# Altium PCB CH32L103C8T6-R0-1v2.PcbDoc
Units mil, origin at the board's own origin, x right, y up, seen from the top; angles counter-clockwise.
Board outline 1811.04 x 2204.72 mil, 2 copper layers (Top Layer, Bottom Layer); 43 components, 60 nets, 212 pads, 186 vias.
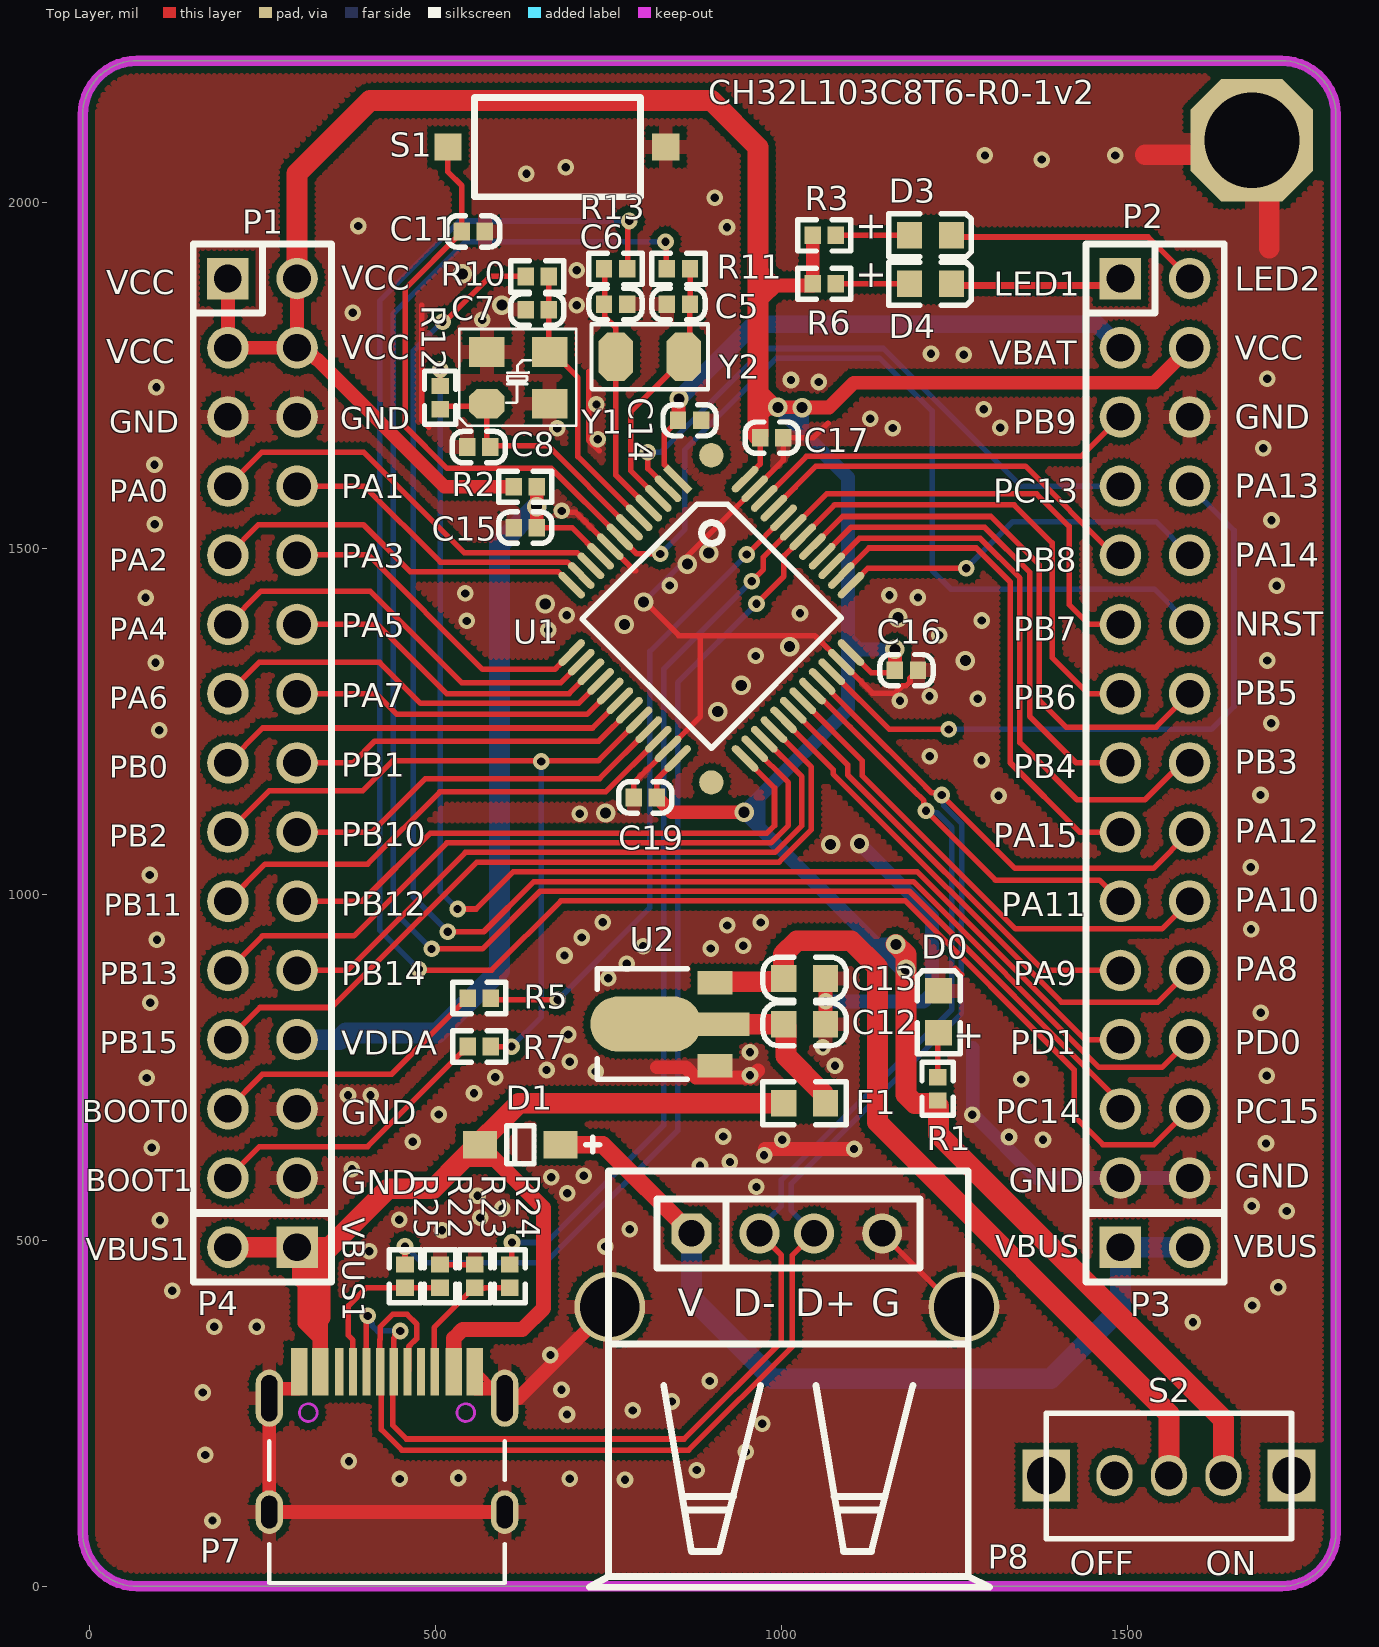
[diagram p0: Top Layer view]
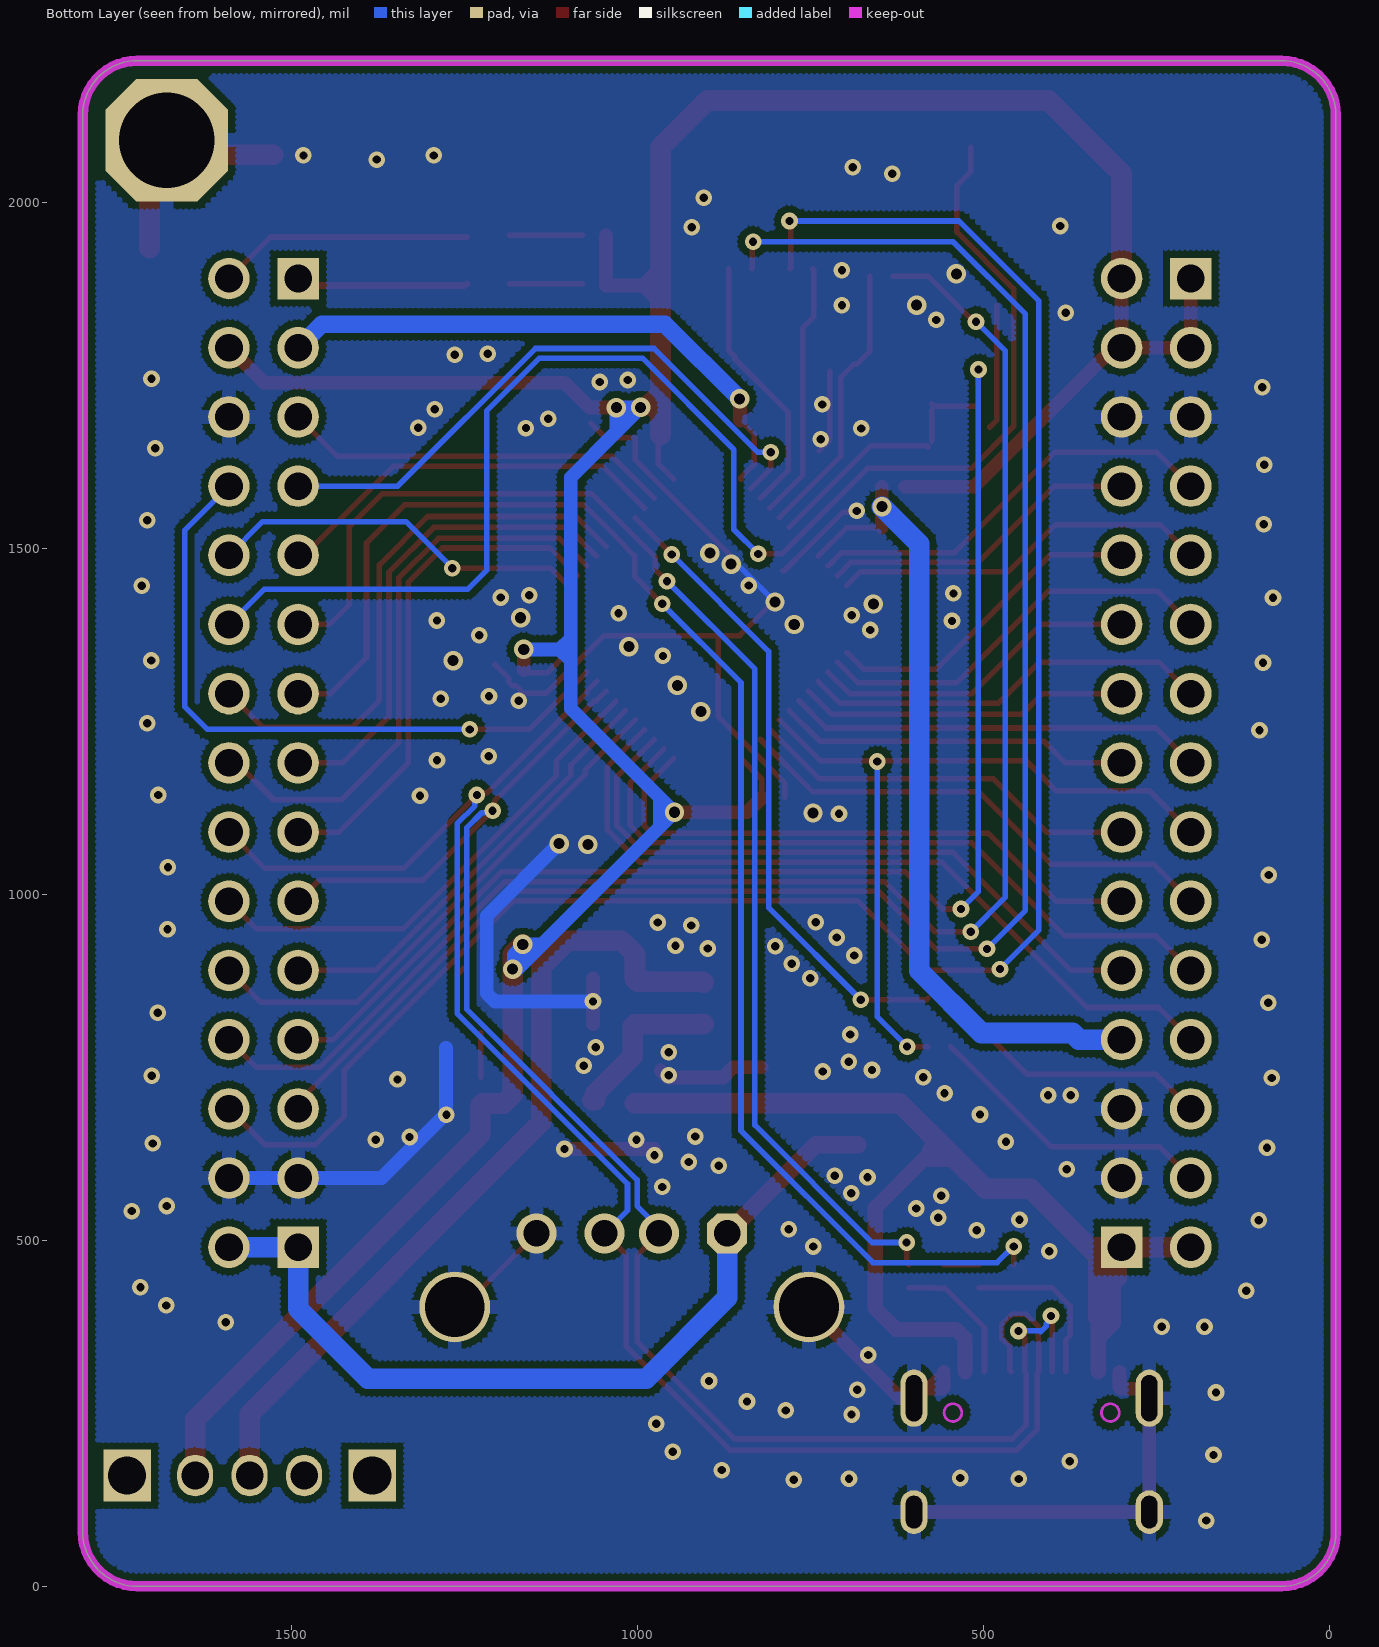
[diagram p1: Bottom Layer view, seen from below]

## Layer stack, top to bottom
Top Solder: solder mask 0.4, Solder Resist, Dk 3.5
Top Layer: signal copper 1.4
Dielectric1: dielectric 12.6, FR-4, Dk 4.8
Bottom Layer: signal copper 1.4
Bottom Solder: solder mask 0.4, Solder Resist, Dk 3.5

## Board outline
69.02,0 cw(c69.02,78.74) -9.72,78.74 -9.72,2125.98 cw(c69.02,2125.98) 69.02,2204.72 1722.6,2204.72 cw(c1722.6,2126.01) 1801.31,2126.01 1801.31,2126.13 1801.31,78.74 cw(c1722.57,78.74) 1722.57,0

## Design rules (kind name [scope] priority, off if disabled: settings)
Clearance Clearance_1 [InPolygon] p1: gap=10 ignorepadtopadclearanceinfootprint=FALSE
Clearance [All] p2: gap=6 ignorepadtopadclearanceinfootprint=FALSE except(8: Arc-Via Track-Via SMDPad-Via THPad-Via Via-Via Via-Fill Via-Poly Via-Region Via-Hole)
ComponentClearance [All] p1 off: gap=10 collisioncheckmode=3 verticalgap=10 showdistances=FALSE
DiffPairsRouting [All] p1: maxlimit=10 minlimit=6 mostfreqgap=8 toplayer_minwidth=6 toplayer_maxwidth=15 toplayer_prefwidth=8 bottomlayer_minwidth=6 bottomlayer_maxwidth=15 bottomlayer_prefwidth=8 maxuncoupledlength=500
MinimumSolderMaskSliver [All] p1 off: minsoldermaskwidth=10
PolygonConnect PolygonConnect_1 [IsVia] p1: connectstyle=Direct reliefconductorwidth=10 reliefentries=4 polygonreliefangle="90 Angle" airgapwidth=10
PolygonConnect [All] p2: connectstyle=Relief reliefconductorwidth=20 reliefentries=4 polygonreliefangle="90 Angle" airgapwidth=10
RoutingVias [All] p1: holewidth=16 width=28 viastyle="Through Hole" minholewidth=12 minwidth=24 maxholewidth=28 maxwidth=50
SilkToSilkClearance [All] p1 off: silktosilkclearance=10
SilkToSolderMaskClearance [IsPad] p1 off: minsilkscreentomaskgap=10 clearancetoexposedcopper=TRUE
SolderMaskExpansion [All] p1: expansion=2 istentingtop=FALSE
Width [All] p1: maxlimit=100 minlimit=6 preferedwidth=10
25 further rules are at their usual default settings.

## Classes and differential pairs
differential pair NewDifferentialPair1: +PA12 -PA11

## Components (designator, comment, footprint, x,y, rotation, side; value= is the part's Value field where it differs from the comment)
C5 "12pF" 0402_C 868,1853 r270 top
C6 "12pF" 0402_C 743.54,1853 r90 top
C7 "22pF" 0402_C 630.54,1845 r90 top
C8 "22pF" 0402_C 545.82,1646.4 r90 top
C11 "0.1uF" 0402_C 571.46,1958 r270 top
C12 "10uF" 0603_C 1003.19,812.25 r0 top
C13 "10uF" 0603_C 1003.19,878.25 r0 top
C14 "0.1uF" 0402_C 850.54,1685 r90 top value=15pF
C15 "0.1uF" 0402_C 646.46,1530 r270 top value=15pF
C16 "0.1uF" 0402_C 1164.01,1324.01 r90 top value=15pF
C17 "0.1uF" 0402_C 1002.83,1660 r270 top value=15pF
C19 "0.1uF" 0402_C 786.54,1140 r90 top value=15pF
D0 "POWER  red" 0603+ 1227.1,799.91 r90 top
D1 "Diode" SOD-123 680.81,638.25 r180 top
D3 "LED2" 0603+ 1185.18,1952.38 r0 top
D4 "LED1" 0603+ 1185.18,1882.38 r0 top
F1 "500mA" 0603 1003.19,698.2 r0 top
P1 "HEADER 14x2" IDC28-2.54MM 200,1890 r0 top
P2 "HEADER 14x2" IDC28-2.54MM 1490,1890 r0 top
P3 "HEADER 2" SIP2-2.54mm 1490,490 r270 top
P4 "HEADER 2" SIP2-2.54mm 300,490 r90 top
P7 "TYPE-C" TYPE-C-Receptacle-2.0 430,310 r0 top
P8 "USB_A" USBAF 870,510 r0 top
R1 "1K" 0402 1225.82,735.63 r270 top
R2 "0Ω" 0402 613,1589 r0 top
R3 "1K" 0402 1045.18,1952.38 r0 top
R5 "10K" 0402 580,850 r180 top
R6 "1K" 0402 1045.18,1882.38 r0 top
R7 "10K" 0402 580,780 r180 top
R10 "NC(0Ω)" 0402 630.54,1893 r0 top
R11 "NC(0Ω)" 0402 834.54,1904 r0 top
R12 "NC(0Ω)" 0402 506.79,1734.7 r270 top
R13 "NC(0Ω)" 0402 777,1904 r180 top
R22 "5.1K" 0402 506.45,431.54 r90 top
R23 "5.1K" 0402 556.91,431.54 r90 top
R24 "0Ω" 0402 607.36,465 r270 top
R25 "0Ω" 0402 456,431.54 r90 top
S1 "KEY" SMD_6.1x3.65x2.5mm-KEY 518,2080 r0 top
S2 "SW" SW1 1560,160 r0 top
U1 "CH32L103C8T" LQFP48 850,1600 r225 top
U2 "HT7533" SOT-89 904.04,752.55 r90 top
Y1 "8M" XT3225 574.45,1709 r0 top
Y2 "32.768k" FC-135 859,1777 r180 top

## Footprints (in the part's own frame and the unit in brackets; to place one, negate y for a bottom-side part, rotate by r counter-clockwise, add the part's x,y. Pads: shape width x height; smd on the part's side, far side on the other; paste and mask are expansions set on the pad)
0402 [mm]
  rect 0.6x0.65 smd mask+0.051: 1(0,0) 2(0.85,0)
  silkscreen extent -0.55,-0.58 1.4,0.57
0402_C [mm]
  rect 0.65x0.6 smd mask+0.051: 1(0,0) 2(0,-0.85)
  silkscreen extent -0.58,-1.4 0.57,0.55
0603 [mm]
  rect 0.93x0.98 smd: 1(0,0) 2(1.54,0)
  silkscreen extent -0.76,-0.79 2.3,0.79
0603+ [mm]
  rect 0.93x0.98 smd: 1(0,0) 2(1.54,0)
  silkscreen extent -0.76,-0.79 2.27,0.79
0603_C [mm]
  rect 0.93x0.98 smd mask+0.051: 1(0,0) 2(1.54,0)
  silkscreen extent -0.76,-0.79 2.31,0.79
FC-135 [mil]
  oct 50x70 smd: 1(0,0) 2(98.43,0)
  silkscreen extent -35,-47 133,47
IDC28-2.54MM [mil]
  rect 60x60 hole 40: 1(0,0)
  round 60 hole 40: 2(100,0) 3(0,-100) 4(100,-100) 5(0,-200) 6(100,-200) 7(0,-300) 8(100,-300) 9(0,-400) 10(100,-400) 11(0,-500) 12(100,-500) 13(0,-600) 14(100,-600) 15(0,-700) 16(100,-700) 17(0,-800) 18(100,-800) 19(0,-900) 20(100,-900) 21(0,-1000) 22(100,-1000) 23(0,-1100) 24(100,-1100) 25(0,-1200) 26(100,-1200) 27(0,-1300) 28(100,-1300)
  silkscreen extent -50,-1351 150,50
LQFP48 [mm]
  round 0.889 smd: 0(-1.496,0.254) 0(6.996,8.746)
  rect 0.28x1.27 smd mask+0.051: 1(0,0)
  oval 0.28x1.27 smd mask+0.051: 2(0.5,0) 3(1,0) 4(1.5,0) 5(2,0) 6(2.5,0) 7(3,0) 8(3.5,0) 9(4,0) 10(4.5,0) 11(5,0) 12(5.5,0) 25(5.5,9) 26(5,9) 27(4.5,9) 28(4,9) 29(3.5,9) 30(3,9) 31(2.5,9) 32(2,9) 33(1.5,9) 34(1,9) 35(0.5,9) 36(0,9)
  oval 1.27x0.28 smd mask+0.051: 13(7.25,1.75) 14(7.25,2.25) 15(7.25,2.75) 16(7.25,3.25) 17(7.25,3.75) 18(7.25,4.25) 19(7.25,4.75) 20(7.25,5.25) 21(7.25,5.75) 22(7.25,6.25) 23(7.25,6.75) 24(7.25,7.25) 37(-1.75,7.25) 38(-1.75,6.75) 39(-1.75,6.25) 40(-1.75,5.75) 41(-1.75,5.25) 42(-1.75,4.75) 43(-1.75,4.25) 44(-1.75,3.75) 45(-1.75,3.25) 46(-1.75,2.75) 47(-1.75,2.25) 48(-1.75,1.75)
  silkscreen extent -0.65,1.15 6.11,7.86
SIP2-2.54mm [mil]
  rect 60x60 hole 40: 1(0,0)
  round 60 hole 40: 2(0,100)
  silkscreen extent -50,-50 50,150
SMD_6.1x3.65x2.5mm-KEY [mm]
  rect 1x1 smd: 1(0,0) 2(8,0)
  silkscreen extent 0.98,-1.83 7.08,1.83
SOD-123 [mm]
  rect 1.25x1 smd: 1(0,0) 2(2.95,0)
  silkscreen extent -1.43,-0.7 1.97,0.7
SOT-89 [mil]
  rect 34x50 smd: 1(0,0) 3(120,0)
  rect 34x100 smd: 2(60,0)
  oval 80x160 smd: ""(60,100)
  silkscreen extent -20,40 140,170
SW1 [mm]
  rect 1.75x1.9 hole 1.4: 0(-4.5,0) 0(4.5,0)
  oval 1.321x1.524 hole 1.016: 1(0,0) 2(-2,0) 3(2,0)
  silkscreen extent -4.51,-2.31 4.5,2.29
TYPE-C-Receptacle-2.0 [mm]
  oval 1x1.6 hole 0.6 slot 1.2 at 90 deg: 0(-4.32,-5.15) 0(4.32,-5.15)
  oval 1x2.1 hole 0.6 slot 1.7 at 90 deg: 0(-4.32,-0.97) 0(4.32,-0.97)
  rect 0.6x1.75 smd mask+0.051: A1(-3.225,0) A4(-2.45,0) B1(3.225,0) B4(2.45,0)
  rect 0.3x1.75 smd mask+0.051: A5(-1.25,0) A6(-0.25,0) A7(0.25,0) A8(1.25,0) B5(1.75,0) B6(0.75,0) B7(-0.75,0) B8(-1.75,0)
  Keep-Out Layer circle w0.1: c-2.89,-1.5 r0.325
  Keep-Out Layer circle w0.1: c2.89,-1.5 r0.325
  silkscreen extent -4.32,-7.75 4.32,-2.55
USBAF [mm]
  round 2.6 hole 2.2: 0(-3,-2.7) 0(10,-2.7)
  oct 1.473x1.473 hole 0.965: 1(0,0)
  round 1.473 hole 0.965: 2(2.5,0) 3(4.5,0) 4(7,0)
  silkscreen extent -3.75,-12.99 10.95,2.29
XT3225 [mm]
  oct 1.3x1.1 smd: 1(0,0)
  rect 1.3x1.1 smd: 2(2.3,0) 3(2.3,1.9) 4(0,1.9)
  silkscreen extent -1.02,-0.8 3.27,2.74

## Part data
C5 C6 C7 C8 C11 C14 C15 C16 C17 C19: library part Cap, "Capacitor", LatestRevisionDate=17-Jul-2002, LatestRevisionNote="Re-released for DXP Platform.", PackageReference=RAD-0.3, Published=8-Jun-2000, Publisher="Altium Limited"
C12 C13: library part CAP, "Capacitor"
D0 D3 D4: library part LED0, "Typical INFRARED GaAs LED", LatestRevisionDate=08-Jul-2005, LatestRevisionNote="Mech Layer 1 removed.", PackageReference=LED-0, Published=8-Jun-2000, Publisher="Altium Limited"
D1: "Default Diode", Code_JEDEC=DO-214-AB, LatestRevisionDate=17-Jul-2002, LatestRevisionNote="Re-released for DXP Platform.", PackageReference=SMC, PackageVersion=Sep-1996, Published=8-Jun-2000, Publisher="Altium Limited"
F1: library part FUSE1, "Fuse"
P1 P2: "Header, 14-Pin, Dual row"
P3 P4: "Header, 2-Pin"
P7: library part TYPE-C1
P8: library part USB, "USB Port"
R1 R3 R6: library part "Res Semi", "Semiconductor Resistor"
R2 R5 R7 R10 R11 R12 R13 R22 R23 R24 R25: library part Res2, "Resistor"
  R5 R7: LatestRevisionDate=17-Jul-2002, LatestRevisionNote="Re-released for DXP Platform.", PackageReference=AXIAL-0.4, Published=8-Jun-2000, Publisher="Altium Limited"
U1: "RISC-V LMD-MCU, 96MHz, USB, Type-C/PD, CAN, OPA, lower power"
U2: library part 1117-3.3V
Y1 Y2: library part XTAL, "Crystal Oscillator", LatestRevisionDate=17-Jul-2002, LatestRevisionNote="Re-released for DXP Platform.", PackageReference=R38, Published=8-Jun-2000, Publisher="Altium Limited"

## Free pads (board coordinates)
  oct 177.17x177.17 hole 137.8: 0(1680,2090)

## Via types
v1: diameter 24, hole 12, Top Layer to Bottom Layer, tented both sides, 163 vias
v2: diameter 28, hole 16, Top Layer to Bottom Layer, tented both sides, 23 vias

## Nets (pads, with @x,y where several pads share a name; then routed paths per layer and width w, separated by ;. In a path a pad name is that pad's centre, name@x,y a point inside that pad or via, vN(x,y) a via of type N, cw(c..) or ccw(c..) an arc to the next point about the centre after c; other vN are vias at no path point)
5V: C12.1 F1.2 U2. U2.2 | length 237.2
  Top Layer w30: U2.2 904.19,812.4 1003.04,812.4 C12.1 1006.5,808.94 1006.5,766.22 1060.52,712.21 1060.52,702.49 F1.2@1064.96,702.49
BOOT0: R5.1 U1.44 | length 929.6
  Top Layer w8: R5.1 582.3,847.7 v1(676.97,847.7) ; v1(950,1491.21) U1.44
  Bottom Layer w8: v1(676.97,847.7) 810,980.73 810,1351.21 v1(950,1491.21)
BOOT1: P1.17 R7.1 U1.20 | length 1121.2
  Top Layer w8: P1.17 259.94,1149.94 395.08,1149.94 438.49,1193.34 735.65,1193.34 U1.20 ; R7.1 v1(610,780)
  Bottom Layer w8: v1(610,780) 652.97,822.97 v1@652.97,1191.93
  other v1: 652.97,1191.94
CC1: P2.13 R25.2 U1.42 | length 2130.6
  Top Layer w8: R25.2 455.55,465.45 456,465.9 v1(456,491) ; v1(964,1420) 1003.66,1459.66 1003.66,1489.19 U1.42 1030.95,1516.95 1076.73,1562.73 1336.34,1562.73 1391.23,1507.84 1391.23,1342.1 1443.34,1290 P2.13
  Bottom Layer w8: v1(456,491) 456.52,491 479.82,467.7 659.36,467.7 850,658.34 850,1306 v1(964,1420)
CC2: P2.11 R24.1 U1.43 | length 1901.6
  Top Layer w8: R24.1 610.14,467.78 610.14,496.26 v1(610.69,496.81) ; v1(957,1452.5) 974,1469.5 974,1487.37 U1.43 1065.46,1578.83 1368.72,1578.83 1415.92,1531.64 1415.92,1418.8 1444.72,1390 P2.11
  Bottom Layer w8: v1(610.69,496.81) 660.47,496.81 830,666.34 830,1325.5 v1(957,1452.5)
GND: C5.2 C6.2 C7.1 C8.1 C11.1 C12.2 C13.2 C14.2 C15.2 C16.2 C17.1 C19.1 D0.2 P1.5 P1.6 P1.26 P1.28 P2.6 P2.27 P2.28 P7.0 P7.A1 P7.B1 P8.0 P8.4 pad.0 R22.2 R23.2 S1.2 U1.8 U1.23 U1.35 U1.47 U2.1 Y1.2 Y1.4 | length 4276.9
  Top Layer w8: P7.A1@298.11,310 P7.A1 ; 480.49,1851.69 480.49,1685.11 490.18,1675.42 ; R22.2 R23.2 ; P7.B1 561.89,310 P7.0@586.34,285.55 ; v1@687.75,1552.15 702.98,1552.15 U1.8 787.44,1467.69 789.83,1467.69 ; 721.57,1755.76 721.57,1656.23 737,1640.81 ; C19.1 786.54,1160.86 835.94,1210.26 U1.23 883,1257.18 883,1374 ; v2(800.88,1422.44) 803.44,1422.44 851.88,1374 883,1374 ; v2(864.14,1477.17) 864.14,1488.86 U1.47 1002.83,1627.56 C17.1 1046.2,1660 1067.34,1681.14 ; P8.4 P8.0@1251.89,403.7 ; C16.2@1205.85,1332.39 C16.2 1185.82,1312.36 1185.82,1307.08 1179.97,1301.22 1174.68,1301.22 1164.17,1290.71 1131.45,1290.71 U1.35 1048.16,1374 883,1374 ; 1251.26,892.84 1260.39,883.72
  Top Layer w20: P7.A1 303.03,287.36 301.22,285.55 268.87,285.55 259.92,276.6 259.92,271.81 259.92,107.24 P7.0@600.08,107.24 ; P7.B1 556.97,287.36 558.78,285.55 P7.0@586.34,285.55 ; P8.0@751.89,403.7 620,271.81 P7.0@600.08,271.81 ; 820.01,750.17 861.34,750.17 876.16,735.35 955.83,735.35 966.02,745.54 ; v1@975.83,632 v1(1105,632) ; C12.2 v1(1063.82,845.25) C13.2 ; P7.0@586.34,285.55 591.13,285.55 600.08,276.6 P7.0@600.08,271.81 ; P7.0@586.34,285.55 P7.0@600.08,271.81
  Top Layer w30: 1526,2069 1659,2069 pad.0 1705,2065 1705,1934
  Bottom Layer w8: v2(800.88,1422.44) 855.61,1477.17 v2(864.14,1477.17)
  Bottom Layer w20: v1(1063.82,845.25) 1205.76,845.25 1217.48,856.97 1217.48,968.56 v2(1112.87,1073.16) ; 1276.5,778.37 1276.5,682.9 1369.4,590 P2.27 P2.28
  other v1: 177.82,94.99 773.89,153.93 448.37,155.14 693.98,155.58 533.22,156.49 877.71,167.94 374.96,180.74 167.15,189.87 948.56,194.3 972.45,234.68 690.18,248.23 785.18,254.13 841.34,267.09 163.59,280 682.17,284.06 896.27,296.72 666.15,334.22 180.19,374.87 241.86,374.87 1594.75,381.7 1680.53,405.89 119.71,427.06 1717.92,432.28 404.53,484.09 745.62,490.99 509.41,514.68 780.9,515.89 101.92,529.05 447.5,529.61 564.77,532.52 1730.39,542.26 596.81,546 1679.8,549.59 560.76,564.57 690.63,568.08 963.91,577.17 667.21,591.22 714.33,593.43 379.28,602.55 882.29,607.89 925.6,613.17 974.97,622.89 89.85,633.64 1700.29,640.02 467.12,642.4 1001.09,645.5 1378.04,645.36 916.01,650 1328.95,649.37 504.62,681.86 1275.69,681.43 373.6,709.62 406.23,709.62 555.77,712.54 1346.48,732.52 82.76,734.65 586.5,735.48 1701.5,737.79 954.59,738.7 731.79,743.89 660.62,746.21 1077.43,752.45 694.28,757.96 954.59,771.83 1060.01,778.96 692.14,797.49 1692.9,828.71 87.98,843.14 749.96,878.59 776.65,899.66 686.47,911.64 897.94,921.7 800.53,924.95 944.72,925.6 97.52,934.5 711.63,937.69 1678.76,949.71 921.77,955.05 741.87,959.85 970.1,959.31 87.14,1027.92 1678.17,1039.16 708.39,1116.47 1313.84,1142.52 1692.36,1143.49 1289.3,1193.93 1214.52,1199.38 100.71,1237.32 1708.03,1247.27 1171.29,1279.62 1283.8,1282.53 1214.13,1286.24 95.54,1334.49 1702.15,1337.99 962.83,1344.59 1228.13,1374.52 663.22,1382.08 545.05,1395.15 1289.46,1395.79 689.98,1403.33 1026.9,1406.34 81.06,1428.57 1197.28,1429.03 1156.1,1432.43 542.97,1434.89 1716.05,1445.8 838.83,1446.34 94.5,1535.05 1708.22,1540.6 682.73,1554.14 93.92,1620.79 1696.46,1644.8 734.66,1657.61 676.01,1673.35 1160.85,1673.82 1316.27,1674.19 1128.59,1687.26 1292.37,1700.97 732.66,1708.01 96.75,1733.06 1053.94,1740.49 1013.79,1743.27 1701.95,1745.08 1263.52,1779.68 1216.13,1781.33 567.74,1830.15 380.68,1840.43 704.15,1851.46 704.15,1902.05 921.32,1964.01 388.43,1965.96 903.61,2006.88 631.46,2041.36 688.32,2050.68 1376.31,2061.91 1294.14,2067.89 1482.39,2067.89
  other v2: 1071.26,1072.12 745.87,1117.52 908,1264 942,1302 1265.93,1337.66 1012,1358 773,1390 1168.56,1399.71 658.69,1419.6 895,1493 596.06,1851.41 538.78,1896.82
LED1: D4.2 P2.1 | length 243.7
  Top Layer w10: D4.2@1250.45,1880 1480,1880 P2.1
LED2: D3.2 P2.2 | length 369
  Top Layer w8: D3.2@1245.81,1950 1530,1950 P2.2
NetC13_1: C13.1 S2.1 U2.3 | length 1196
  Top Layer w30: U2.3 905.28,873.78 982.34,873.78 982.52,873.96 999.89,873.96 1003.19,877.27 C13.1 1003.19,913.56 1022.54,932.91 1100.55,932.91 1138.7,894.76 1138.7,670.5 1560,249.2 1560,174.16 S2.1@1560,170
NetD0_1: D0.1 R1.1 | length 64.3
  Top Layer w8: R1.1 D0.1@1225.82,799.91
NetD3_1: D3.1 R3.2 | length 106.5
  Top Layer w8: R3.2 D3.1
NetD4_1: D4.1 R6.2 | length 106.5
  Top Layer w8: R6.2 D4.1
NetP1_25: P1.25 R5.2 | length 413.4
  Top Layer w8: P1.25 250.03,740.03 436.56,740.03 537.74,841.2 538.72,841.2 546.54,849.02 R5.2
NetP1_27: P1.27 R7.2 | length 425.8
  Top Layer w8: P1.27 245.5,635.5 402.04,635.5 537.74,771.2 538.72,771.2 546.54,779.02 R7.2
NetP7_A5: P7.A5 R22.1 R25.1 | length 241.1
  Top Layer w8: P7.A5 380.79,355.94 374.25,362.48 374.25,405.31 400.47,431.54 R25.1 R22.1
NetP7_B5: P7.B5 R23.1 R24.2 | length 197.9
  Top Layer w8: P7.B5 498.06,310.83 498.06,373.68 555.92,431.54 R23.1 557.66,430.79 570.23,430.79 570.98,431.54 R24.2
NRST: C11.2 P2.12 S1.1 U1.7 | length 2135.2
  Top Layer w8: S1.1 518,2044.11 538,2024.11 C11.2 538,1957.02 456.04,1875.06 456.04,1676.49 516.91,1615.61 667.35,1615.61 U1.7 790.97,1492 v1(825,1492)
  Bottom Layer w8: v1(825,1492) 860.48,1527.48 860.48,1642.72 992.6,1774.84 1141.46,1774.84 1217.68,1698.62 1217.68,1468.13 1244.7,1441.12 1538.88,1441.12 P2.12
OSCI: C5.1 R11.2 U1.3 Y2.1 | length 384.1
  Top Layer w8: U1.3 782,1612.32 782,1697 859,1774 Y2.1 867.75,1785.75 867.75,1852.75 C5.1 R11.2
OSCO: C6.1 R13.2 U1.4 Y2.2 | length 373.6
  Top Layer w8: R13.2@746,1904 744.77,1902.77 744.77,1854.23 C6.1 744.95,1851.59 744.95,1834.6 760.57,1818.98 Y2.2 760.57,1605.91 U1.4
PA0: P1.7 U1.10 | length 613.2
  Top Layer w8: P1.7 249.19,1639.19 396.22,1639.19 541.41,1494 704.63,1494 723.91,1474.73 U1.10
PA1: P1.8 U1.11 | length 464.3
  Top Layer w8: P1.8 397,1590 507,1480 690.79,1480 709.99,1460.81 U1.11
PA2: P1.9 U1.12 | length 551.4
  Top Layer w8: P1.9 244.25,1534.25 395.67,1534.25 463.92,1466 677.77,1466 U1.12
PA3: P1.10 U1.13 | length 476.1
  Top Layer w8: P1.10 300.85,1490.85 402.37,1490.85 568.22,1325 672.44,1325 678.72,1331.28 U1.13
PA4: P1.11 U1.14 | length 598
  Top Layer w8: P1.11 248.16,1438.16 405.74,1438.16 538.27,1305.63 680.9,1305.63 U1.14
PA5: P1.12 U1.15 | length 479.2
  Top Layer w8: P1.12 416.18,1390 516.18,1290 693.11,1290 U1.15
PA6: P1.13 U1.16 | length 595
  Top Layer w8: P1.13 245.23,1335.23 419.26,1335.23 478.49,1276 706.95,1276 U1.16
PA7: P1.14 U1.17 | length 479
  Top Layer w8: P1.14 414.26,1290 444.26,1260 718.79,1260 U1.17
PA8: P2.22 U1.29 | length 778.6
  Top Layer w8: U1.29 1074.85,1180.27 1074.85,1173.91 1404.67,844.09 1544.09,844.09 P2.22
PA9: P2.21 U1.30 | length 637.1
  Top Layer w8: U1.30 1095.91,1187.06 1095.91,1172.65 1378.56,890 P2.21
PA10: P2.20 U1.31 | length 725.4
  Top Layer w8: U1.31 1030.95,1279.05 1117.08,1192.92 1117.08,1171.28 1338.36,950 1550,950 P2.20
PA11: P2.19 P7.A7 P7.B7 P8.2 U1.32 | length 2409.2
  Top Layer w8: P7.B7 400.2,310.27 400.2,388.96 v1(401.98,390.74) ; v1(449,369) 447.82,369 446.82,368 446.64,368.17 441,362.53 441,359.43 439.84,358.27 P7.A7 438,308.16 438,232.93 458.09,212.84 859.41,212.84 999.8,353.23 999.8,478.63 P8.2 ; U1.32 1059.23,1279.41 1061.84,1279.41 1099.15,1242.1 1191.18,1150.07 1205.93,1135.32 1205.93,1124.01 v1(1208.99,1120.95) 1309.42,1020.51 1459.49,1020.51 P2.19
  Bottom Layer w8: v1(401.98,390.74) 401.98,386.41 408.67,379.72 408.67,376.06 416.72,368 417.72,369 v1(449,369) ; P8.2 968.43,518.11 1000,549.69 1000,587.41 1246.22,833.62 1246.22,1096.35 1224.68,1117.88 1212.05,1117.88 v1(1208.99,1120.95)
PA12: P2.18 P7.A6 P7.B6 P8.3 U1.33 | length 2562.8
  Top Layer w8: P7.B6 461.43,311.91 461.43,346.49 463.31,348.37 463.31,348.59 469.16,354.45 469.39,354.45 473,358.06 473,378.94 458.94,393 438.06,393 420.33,375.27 420.33,357.25 419.53,356.45 419.53,310.63 P7.A6 422,308.16 422,226.3 451.47,196.84 866.03,196.84 1015.8,346.6 1015.8,478.63 P8.3 ; U1.33 1073.15,1293.33 1073.15,1290.73 1115.15,1248.73 1197.81,1166.07 1217.24,1146.63 1228.56,1146.63 v1(1231.62,1143.57) 1337.59,1037.6 1537.6,1037.6 P2.18
  Bottom Layer w8: P8.3 1014,543.17 1014,581.61 1260.22,827.83 1260.22,960.02 1260.36,960.16 1260.36,1102.2 1234.68,1127.88 1234.68,1140.51 v1(1231.62,1143.57)
PA13: P2.8 U1.34 | length 974.8
  Top Layer w8: U1.34 1156,1238.33 v1(1241.83,1238.33)
  Bottom Layer w8: v1(1241.83,1238.33) 1621.19,1238.33 1654.07,1271.21 1654.07,1397.5 1654.07,1525.93 P2.8
PA14: P2.10 U1.37 | length 553.4
  Top Layer w8: U1.37 1124.99,1471.32 v1(1267.13,1471.32) ; P2.10@1584.07,1470 P2.10@1590,1470
  Bottom Layer w8: v1(1267.13,1471.32) 1334.33,1538.52 1541.48,1538.52 P2.10
PA15: P2.17 U1.38 | length 742.9
  Top Layer w8: U1.38 1126.33,1500.51 1281.57,1500.51 1330.72,1451.36 1330.72,1190.15 1430.88,1090 P2.17
PB0: P1.15 U1.18 | length 603.7
  Top Layer w8: P1.15 250.38,1240.38 727.01,1240.38 U1.18
PB1: P1.16 U1.19 | length 511.9
  Top Layer w8: P1.16 380.82,1190 412.1,1221.27 735.74,1221.27 U1.19
PB3: P2.16 U1.39 | length 851.6
  Top Layer w8: U1.39 1112.5,1514.51 1277.69,1514.51 1287.37,1514.51 1344.72,1457.16 1344.72,1447.47 1344.72,1219.35 1427.38,1136.69 1525.23,1136.69 1578.54,1190 P2.16
PB4: P2.15 U1.40 | length 711.6
  Top Layer w8: U1.40 1100.66,1530.52 1293.79,1530.52 1358.72,1465.58 1358.72,1257.36 1426.09,1190 P2.15
PB5: P2.14 U1.41 | length 823.9
  Top Layer w8: U1.41 1088.36,1546.05 1302.77,1546.05 1372.72,1476.1 1372.72,1280.39 1411.51,1241.6 1541.6,1241.6 P2.14
PB8: P2.9 U1.45 | length 622.1
  Top Layer w8: 1019.66,1587.89 990.01,1558.24 U1.45 1049.87,1618.92 1352.44,1618.92 1481.36,1490 P2.9
PB9: P2.5 U1.46 | length 563.5
  Top Layer w8: U1.46 1036.03,1632.92 1432.91,1632.92 P2.5
PB10: P1.18 U1.21 | length 569.6
  Top Layer w8: P1.18 408.22,1090 485.49,1167.27 737.42,1167.27 U1.21
PB11: P1.19 U1.22 | length 719.2
  Top Layer w8: P1.19 253.71,1043.71 402.05,1043.71 506.3,1147.96 745.94,1147.96 U1.22
PB12: P1.20 U1.25 | length 849.9
  Top Layer w8: P1.20 394.26,990 492.77,1088.51 979.11,1088.51 990,1099.4 990,1153.77 U1.25
PB13: P1.21 U1.26 | length 1027.6
  Top Layer w8: P1.21 250.09,940.09 382.02,940.09 516.44,1074.51 984.91,1074.51 1010,1099.6 1010,1161.61 U1.26
PB14: P1.22 U1.27 | length 963.5
  Top Layer w8: P1.22 372.86,890 543.37,1060.51 990.71,1060.51 1029.45,1099.25 1029.45,1170 U1.27
PB15: P1.23 U1.28 | length 1136.3
  Top Layer w8: P1.23 246.46,836.46 349.93,836.46 559.97,1046.51 996.51,1046.51 1043.45,1093.45 1043.45,1183.84 U1.28
PC13: P2.7 U1.2 | length 892.4
  Top Layer w8: v1(807,1639) 807,1615.16 U1.2
  Bottom Layer w8: v1(807,1639) 825.84,1639 975.68,1788.84 1147.26,1788.84 1346.1,1590 P2.7
PC14: P2.25 R11.1 | length 2583.1
  Top Layer w8: v1(494.44,921.1) 567.97,921.1 651.37,1004.51 1184.86,1004.51 1490,699.36 P2.25 ; v1(832.52,1943.1) 833.53,1942.09 833.53,1905.01 R11.1
  Bottom Layer w8: v1(494.44,921.1) 438.91,976.64 438.91,1838.42 543.58,1943.1 v1(832.52,1943.1)
PC15: P2.26 R13.1 | length 2830
  Top Layer w8: v1(475.67,892.01) 477.08,890.61 581.32,890.61 681.22,990.51 1179.06,990.51 1423.06,746.51 1423.06,679.84 1464.63,638.27 1538.27,638.27 P2.26 ; R13.1@779.46,1904 777.99,1905.48 777.99,1971.18 v1(779.92,1973.11)
  Bottom Layer w8: v1(475.67,892.01) 419.83,947.85 419.83,1857.95 535,1973.11 v1(779.92,1973.11)
PD0: P2.24 R10.1 | length 2297.2
  Top Layer w8: v1(510.3,1827.64) 513.78,1827.64 579.14,1893 R10.1 ; v1(517.9,945.97) 569.79,945.97 642.32,1018.51 1190.66,1018.51 1459.16,750 1550,750 P2.24
  Bottom Layer w8: v1(510.3,1827.64) 467.93,1785.27 467.93,995.94 v1(517.9,945.97)
PD1: P2.23 R12.1 | length 1901.7
  Top Layer w8: v1@501.8,1763.49 v1(506.79,1758.49) R12.1 ; v1(531.98,978.82) 558.72,978.82 612.4,1032.51 1196.46,1032.51 1438.96,790 P2.23
  Bottom Layer w8: v1(506.79,1758.49) 506.79,1004 v1(531.98,978.82)
VBAT: C14.1 P2.3 U1.1 | length 829.3
  Top Layer w8: U1.1 850,1602.14 831,1621.14 831,1665.46 C14.1
  Top Layer w20: C14.1 851.27,1685.73 851.27,1715.27 v2(852,1716)
  Bottom Layer w25: v2(852,1716) 959.91,1823.91 1456.09,1823.91 P2.3
VBUS: D1.1 P3.1 P3.2 P8.1 | length 1234.5
  Top Layer w25: D1.1 741.75,638.25 P8.1
  Bottom Layer w30: P8.1 870,417 987,300 1388.9,300 1490,401.1 P3.1 P3.2
VBUS1: D1.2 F1.1 P4.1 P4.2 P7.A4 P7.B4 | length 1802.1
  Top Layer w22: P4.1@303.37,486.63 303.37,444.6 311.85,436.11 ; 320.34,447.26 320.34,427.63 311.85,436.11 ; P7.A4 333.54,358.67 ; 333.54,389.18 333.54,358.67 ; P7.B4 526.46,358.34 539.34,371.23 625.48,371.23 655.99,401.75 655.99,546.93 586.31,616.61 ; 539.13,616.8 539.32,616.61 586.31,616.61 ; D1.2 569.59,638.25 578.28,629.57 578.28,624.64 586.31,616.61 ; 311.85,436.11 311.85,380.36 333.54,358.67
  Top Layer w30: P4.2 P4.1 347.12,490 ; P4.1@309.05,480.95 333.54,456.46 ; 333.54,389.18 333.54,456.46 ; F1.1 620.53,698.2 539.13,616.8 496.86,574.53 431.64,574.53 347.12,490 ; 333.54,456.46 333.54,476.43 347.12,490
VCC: C16.1 C17.2 C19.2 P1.1 P1.2 P1.3 P1.4 P2.4 R1.2 R2.1 R3.1 R6.1 S2.3 U1.24 U1.36 U1.48 | length 5743.8
  Top Layer w8: C19.2 820,1166.34 U1.24 ; U1.48 969.37,1621.93 C17.2 ; U1.36 1130,1320 C16.1@1160,1320
  Top Layer w20: P1.1 P1.3 P1.4 ; P1.2 P1.4 ; R2.1 513.3,1589 328.57,1773.72 327.1,1773.72 310.82,1790 P1.4 ; C19.2 820,1139.02 821.81,1137.2 822.8,1137.2 841.35,1118.65 v2(946.06,1118.65) ; 968.52,1900.62 971.39,1900.62 992.01,1880 ; 969.37,1694.9 969.37,1706.65 ; 969.37,1726.35 969.37,1860.74 ; 969.37,1880 991.87,1880 ; 971.02,1726.35 992.1,1705.26 993.41,1705.26 v2(994.95,1703.73) ; 972.61,1860.74 991.87,1880 ; 972.93,1694.9 980.24,1702.2 993.41,1702.2 v2(994.95,1703.73) ; R6.1@1045.18,1880 992.01,1880 ; R6.1 R3.1 ; C16.1 v2(1164,1354) ; P2.4 1539.44,1739.44 1105.02,1739.44 1069.01,1703.43 v2(1030.02,1703.43) 1029.56,1703.88 995.1,1703.88 v2(994.95,1703.73) ; 991.87,1880 992.01,1880
  Top Layer w30: P1.2 300,2041.65 405.58,2147.23 898.89,2147.23 966.3,2079.81 966.3,1900.62 966.3,1880 966.3,1860.74 966.3,1726.35 966.3,1706.65 C17.2@966.3,1663.76 ; v2(1165.36,927.75) 1180,913.11 v2(1180,892) 1180,710.31 1192.77,697.54 R1.2@1223,697.54 ; R1.2@1222.35,694.19 1226.87,689.66 ; R1.2@1223.52,697.54 1226.87,694.19 1226.87,689.66 ; S2.3 1638.74,241.26 1226.87,653.13 1226.87,689.66
  Bottom Layer w20: v2(994.95,1703.73) v2@995.1,1703.58 ; v2(1164,1354) 1112,1354 ; P2.4 P2.4@1597.43,1782.57 ; 967.02,1097.69 967.02,1139.61 ; 967.02,1097.69 1139.68,925.03 ; 967.02,1097.69 v2(946.06,1118.65) 967.02,1139.61 ; 967.02,1139.61 1096,1268.59 1096,1338 ; v2@995.1,1703.58 1029.87,1703.58 v2(1030.02,1703.43) 1030.02,1668.65 ; v2@995.1,1703.58 1030.02,1668.65 ; 1030.02,1668.65 1096,1602.68 1096,1370 ; 1096,1338 1112,1354 ; 1096,1338 1096,1370 ; 1096,1370 1112,1354 ; 1139.68,925.03 v2@1168.55,896.17 ; 1139.68,925.03 1142.4,927.75 v2(1165.36,927.75) ; v2(1165.36,927.75) 1165.36,925.59 v2@1168.55,922.4 ; v2(1165.36,927.75) 1168.55,924.56 v2@1168.55,922.4 ; v2@1168.55,896.17 v2@1168.55,922.4 ; v2@1168.55,896.17 1172.71,892 v2(1180,892) 1178.47,893.53 1178.47,912.47 v2@1168.55,922.4
VDDA: C15.1 P1.24 R2.2 U1.9 | length 1193.4
  Top Layer w8: C15.1@647.81,1529.5 697.79,1529.5 U1.9
  Top Layer w20: C15.1 R2.2
  Bottom Layer w30: P1.24 361.33,790 370.85,799.52 502.5,799.52 592.47,889.49 592.47,1506.51 v2(646.2,1560.23)
XI: C7.2 R10.2 U1.5 Y1.3 | length 405
  Top Layer w8: R10.2 C7.2 664,1784.8 Y1.3 682.65,1766.15 686.59,1766.15 706,1746.74 706,1632.64 U1.5
XO: C8.2 R12.2 U1.6 Y1.1 | length 366.7
  Top Layer w8: R12.2 510.68,1705.12 570.57,1705.12 Y1.1 ; C8.2@574.45,1655.04 Y1.1@574.45,1700 ; C8.2 581.3,1648.42 662.38,1648.42 U1.6
pads on no net: P7.A8 P7.B8 S2.0 S2.2 U1.0

## Polygon pours and split planes (outlines as drawn)
GND on Bottom Layer "Top Layer-No Net" (hatched 90Degree grid 8 track 8, remove dead copper, pour order 1): 1805.28,2204.72 1805.28,0 -9.72,0 -9.72,2204.72
GND on Top Layer "Top Layer-No Net" (hatched 90Degree grid 8 track 8, remove dead copper, pour order 0): -9.72,2204.72 1801.31,2204.72 1801.31,0 -9.72,0

## Keep-outs
Keep-Out Layer:
  lines w15: -9.72,78.74 ccw(c69.02,78.74) 69.02,0 1722.57,0 ccw(c1722.57,78.74) 1801.31,78.74 1801.31,2126.01 ccw(c1722.6,2126.01) 1722.6,2204.72 69.02,2204.72 ccw(c69.02,2125.98) -9.72,2125.98 -9.72,78.74

## Silkscreen, mask and mechanical layers (free items; w line width, h text height)
Top Overlay:
  text "CH32L103C8T6-R0-1v2" at 894,2142 h35
  text "VCC" at 363.78,1874.04 h35
  text "LED2" at 1654.96,1872.3 h35
  text "VCC" at 24.51,1867.04 h35
  text "LED1" at 1306.81,1865.3 h35
  text "VCC" at 363.78,1773.49 h35
  text "VCC" at 1654.96,1772.6 h35
  text "VCC" at 24.51,1767.41 h35
  text "VBAT" at 1300.01,1765.6 h35
  text "GND" at 1654.96,1672.91 h35
  text "GND" at 362.78,1671.93 h32
  text "GND" at 28.51,1666.78 h32
  text "PB9" at 1335,1665.91 h35
  text "PA13" at 1654.96,1573.22 h35
  text "PA1" at 363.78,1572.38 h35
  text "PA0" at 28.51,1567.15 h32
  text "PC13" at 1305.84,1566.22 h35
  text "PA14" at 1654.96,1473.53 h35
  text "PA3" at 363.78,1471.83 h35
  text "PA2" at 28.51,1467.52 h32
  text "PB8" at 1335,1466.53 h35
  text "NRST" at 1654.96,1373.84 h35
  text "PA5" at 363.78,1371.27 h35
  text "PA4" at 28.51,1367.89 h32
  text "PB7" at 1335,1366.84 h35
  text "PB5" at 1654.96,1274.15 h35
  text "PA7" at 363.78,1270.72 h35
  text "PA6" at 28.51,1268.26 h32
  text "PB6" at 1335,1267.15 h35
  text "PB3" at 1654.96,1174.46 h35
  text "PB1" at 363.78,1170.17 h35
  text "PB0" at 28.51,1168.63 h32
  text "PB4" at 1335,1167.46 h35
  text "PA12" at 1654.96,1074.77 h35
  text "PB10" at 363.78,1069.61 h35
  text "PB2" at 28.51,1069 h32
  text "PA15" at 1305.84,1067.77 h35
  text "PA10" at 1654.96,975.08 h35
  text "PB11" at 20.52,969.36 h32
  text "PB12" at 363.78,969.06 h35
  text "PA11" at 1317.51,968.08 h35
  text "PA8" at 1654.96,875.39 h35
  text "PB13" at 15.18,869.73 h32
  text "PB14" at 363.78,868.5 h35
  text "PA9" at 1335,868.39 h35
  text "PB15" at 15.18,770.1 h32
  text "PD1" at 1330.51,768.7 h35
  text "PD0" at 1654.96,768.7 h35
  text "VDDA" at 363.78,767.95 h35
  text "BOOT0" at -10.48,670.47 h32
  text "PC14" at 1309.76,669.01 h35
  text "PC15" at 1654.96,669.01 h35
  text "GND" at 363.78,667.4 h35
  text "GND" at 1654.96,576.32 h35
  text "BOOT1" at -5.15,570.84 h32
  text "GND" at 1328.83,569.32 h35
  text "GND" at 363.78,566.84 h35
  text "VBUS1" at 365.99,532.37 h32 r270
  text "VBUS" at 1309.12,475.62 h32
  text "VBUS" at 1653.96,475.62 h32
  text "VBUS1" at -5.15,471.06 h32
  text "OFF" at 1417,16 h35
  text "ON" at 1613,16 h35
Mechanical 1:
  lines w8: 1801.31,2126.01 ccw(c1722.6,2126.01) 1722.6,2204.72 69.02,2204.72 ccw(c69.02,2125.98) -9.72,2125.98 -9.72,78.74 ccw(c69.02,78.74) 69.02,0 1722.57,0 ccw(c1722.57,78.74) 1801.31,78.74 1801.31,2126.13

## Text inside footprints (layer, text, board x,y; h text height)
D0: Top Overlay "+" at 1293.98,812.21 h40 r180
D3: Top Overlay "+" at 1147.11,1941.4 h40 r90
D4: Top Overlay "+" at 1147.11,1871.4 h40 r90
P8: Top Overlay "G" at 1130,390 h40; Top Overlay "V" at 850,390 h40; Top Overlay "D+" at 1020,390 h40; Top Overlay "D-" at 930,390 h40